# EAGLE board GEF-USB-B (EAGLE 6.4)
APPROVED: R.STARR; CHECKED: R.STARR; COMPANY: KG4LNE; COPYRIGHT: , KG4LNE; DATECODE: F1813; DRAWN: R.STARR; DRGNO: GEF-USB.2XX; REV: B; TITLE: GE-FLASH-USB
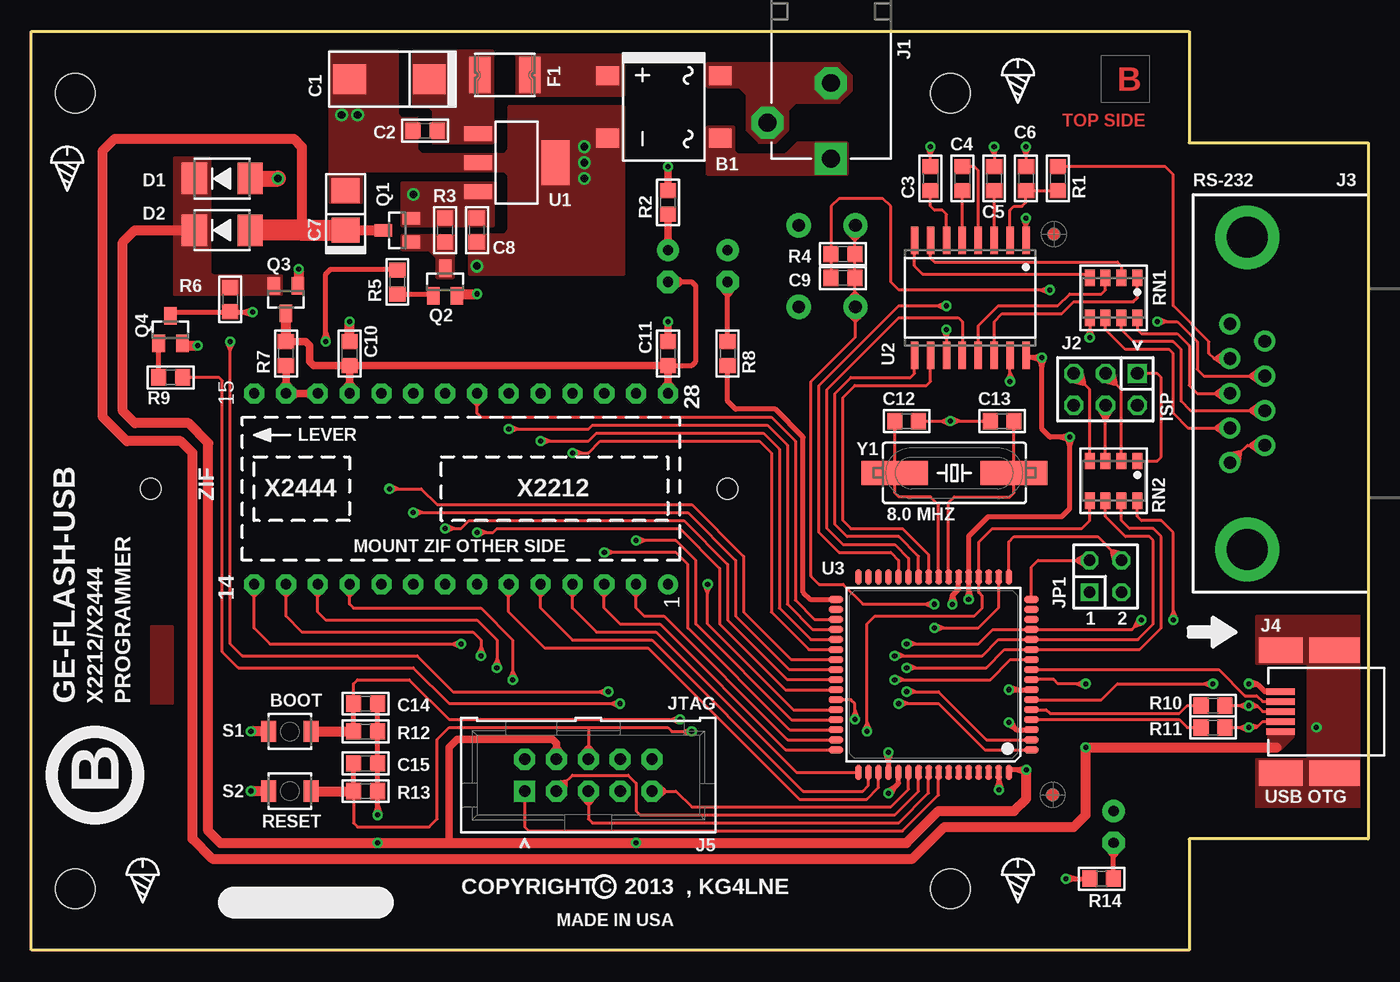
[diagram p0: board, top side]
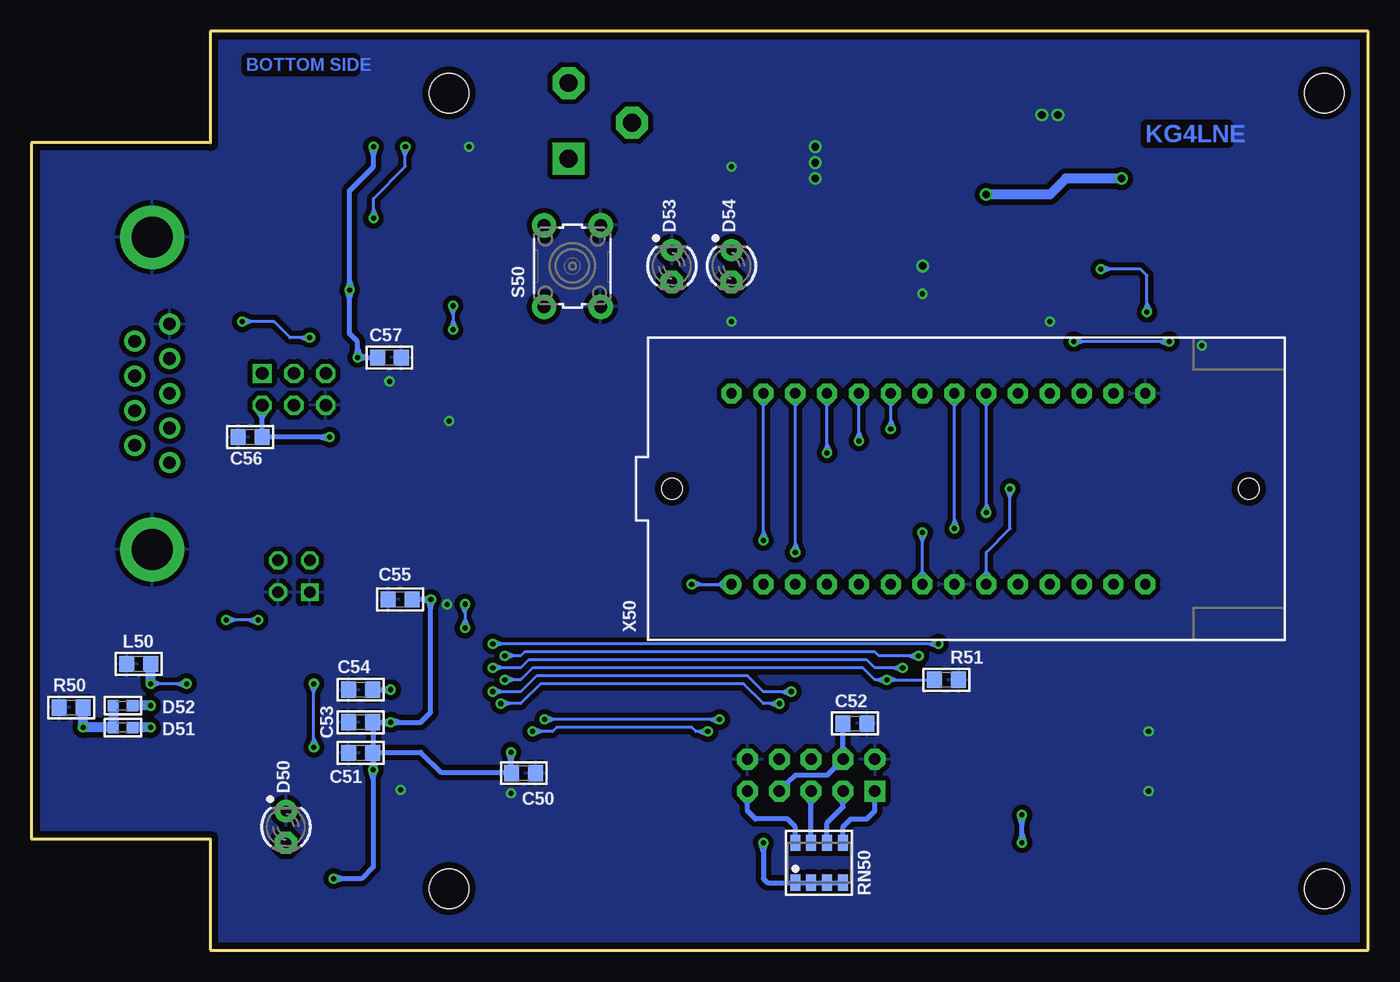
[diagram p1: board, bottom side, seen from below]

Size 106.68 x 73.34 mm. Coordinates in mm from the lower left corner, seen from the top.
Outline: 92.39,73.34 92.39,64.45 106.68,64.45 106.68,8.89 92.39,8.89 92.39,0 0,0 0,73.34 92.39,73.34
Copper layers (1*16): Top 0.035mm / dielectric 1.5mm / Bottom 0.035mm
Design rules "default *": minimum track width 7mil, minimum drill 16mil, track to track 8mil, track to pad 8mil, pad to pad 8mil, via to via 8mil, smd to smd 8mil, copper to edge 20mil, drill to drill 8mil, minimum pad ring 10mil, minimum via ring 8mil, stop-mask expansion 4mil, vias tented up to drill 24mil, thermal gap 16mil
Net classes: 0 default: width 0.178 mm, clearance 0.178 mm
Holes 3.17 mm at 73.34,4.92 3.49,68.42 3.49,4.92 73.34,68.42
Milling: 8 lines

## Footprints (pad centres in the part's own frame; a part is rotated, then mirrored left to right if it is on the bottom)
DF-S = smd 1.5 x 1.8: + -2.5,-4.5; - 2.5,-4.5; AC1 2.5,4.5; AC2 -2.5,4.5
C7343/T = smd 2.6 x 2.4: + 3.175,0; - -3.175,0
C0805 = smd 1.2 x 1.3: 1 -0.953,0; 2 0.953,0
C3528/T = smd 2 x 2.2: + 1.587,0; - -1.587,0
SMA = smd 2 x 2.5: A 2.223,0; C -2.223,0
LED3MM = drill 0.813 pad 1.778 octagon: A -1.27,0 | drill 0.813 pad 1.778: K 1.27,0
PGB-0603 = smd 0.9 x 0.9: 1 -0.762,0; 2 0.762,0
F1812 = smd 1.7 x 2.9: 1 -2,0; 2 2,0
PJ-102XH = drill 1.422 pad 2.54 square: 1 0,0 | drill 1.422 pad 2.54 octagon: 2 0,-6.032; 3 5.08,-2.857
HDR-MA03-2 = drill 1.016 square: 1 -2.54,-1.27 | drill 1.016 octagon: 2 -2.54,1.27; 3 0,-1.27; 4 0,1.27; 5 2.54,-1.27; 6 2.54,1.27
NC182M9 = drill 1.016 pad 1.676: 1 -5.537,2.769; 2 -2.769,2.769; 3 0,2.769; 4 2.769,2.769; 5 5.537,2.769; 6 -4.153,0; 7 -1.384,0; 8 1.384,0; 9 4.153,0 | drill 3.251 pad 5.08: G1 12.459,1.384; G2 -12.459,1.384
56579-0576 = smd 0.5 x 2.25: 1 1.6,0; 2 0.8,0; 3 0,0; 4 -0.8,0; 5 -1.6,0 | smd 2.05 x 3.5: S1 -4.9,0; S2 4.9,0 | smd 2.05 x 4: S3 -4.9,4.3; S4 4.9,4.3
HDR-5103309-1 = drill 0.914 pad 1.676 square: 1 -5.08,-1.27 | drill 0.914 pad 1.676 octagon: 2 -5.08,1.27; 3 -2.54,-1.27; 4 -2.54,1.27; 5 0,-1.27; 6 0,1.27; 7 2.54,-1.27; 8 2.54,1.27; 9 5.08,-1.27; 10 5.08,1.27
JP2Q = drill 0.914 square: 1 -1.27,-1.27 | drill 0.914 octagon: 2 -1.27,1.27; 3 1.27,-1.27; 4 1.27,1.27
L0805 = smd 1.2 x 1.3: 1 -0.953,0; 2 0.953,0
SOT23 = smd 1 x 1.4: 1 -0.95,-1.1; 2 0.95,-1.1; 3 0,1.1
R0805 = smd 1.2 x 1.3: 1 -0.953,0; 2 0.953,0
744-8 = smd 0.8 x 1.3: 1 -1.905,-1.587; 2 -0.635,-1.587; 3 0.635,-1.587; 4 1.905,-1.587; 5 1.905,1.587; 6 0.635,1.587; 7 -0.635,1.587; 8 -1.905,1.587
B3U-1000P = smd 1.2 x 1.7: 1 -1.7,0; 2 1.7,0
B3F-10XX-B = drill 1.016 pad 1.93: 1 -3.251,2.261; 2 3.251,2.261; 3 -3.251,-2.261; 4 3.251,-2.261
SOT223 = smd 1.219 x 2.235: 1 -2.311,-3.099; 2 0,-3.099; 3 2.311,-3.099 | smd 3.6 x 2.2: 4 0,3.099
SO16W = smd 0.6 x 2.2: 1 -4.445,-4.6; 2 -3.175,-4.6; 3 -1.905,-4.6; 4 -0.635,-4.6; 5 0.635,-4.6; 6 1.905,-4.6; 7 3.175,-4.6; 8 4.445,-4.6; 9 4.445,4.6; 10 3.175,4.6; 11 1.905,4.6; 12 0.635,4.6; 13 -0.635,4.6; 14 -1.905,4.6; 15 -3.175,4.6; 16 -4.445,4.6
TQFP64A = smd 1.194 x 0.559: 1 -7.8,6; 2 -7.8,5.2; 3 -7.8,4.4; 4 -7.8,3.6; 5 -7.8,2.8; 6 -7.8,2; 7 -7.8,1.2; 8 -7.8,0.4; 9 -7.8,-0.4; 10 -7.8,-1.2; 11 -7.8,-2; 12 -7.8,-2.8; 13 -7.8,-3.6; 14 -7.8,-4.4; 15 -7.8,-5.2; 16 -7.8,-6; 33 7.8,-6; 34 7.8,-5.2; 35 7.8,-4.4; 36 7.8,-3.6; 37 7.8,-2.8; 38 7.8,-2; 39 7.8,-1.2; 40 7.8,-0.4; 41 7.8,0.4; 42 7.8,1.2; 43 7.8,2; 44 7.8,2.8; 45 7.8,3.6; 46 7.8,4.4; 47 7.8,5.2; 48 7.8,6 | smd 0.559 x 1.194: 17 -6,-7.8; 18 -5.2,-7.8; 19 -4.4,-7.8; 20 -3.6,-7.8; 21 -2.8,-7.8; 22 -2,-7.8; 23 -1.2,-7.8; 24 -0.4,-7.8; 25 0.4,-7.8; 26 1.2,-7.8; 27 2,-7.8; 28 2.8,-7.8; 29 3.6,-7.8; 30 4.4,-7.8; 31 5.2,-7.8; 32 6,-7.8; 49 6,7.8; 50 5.2,7.8; 51 4.4,7.8; 52 3.6,7.8; 53 2.8,7.8; 54 2,7.8; 55 1.2,7.8; 56 0.4,7.8; 57 -0.4,7.8; 58 -1.2,7.8; 59 -2,7.8; 60 -2.8,7.8; 61 -3.6,7.8; 62 -4.4,7.8; 63 -5.2,7.8; 64 -6,7.8
ZIF28 = drill 0.813 pad 1.6: 1 -16.51,-7.62 | drill 0.813 pad 1.6 octagon: 2 -13.97,-7.62; 3 -11.43,-7.62; 4 -8.89,-7.62; 5 -6.35,-7.62; 6 -3.81,-7.62; 7 -1.27,-7.62; 8 1.27,-7.62; 9 3.81,-7.62; 10 6.35,-7.62; 11 8.89,-7.62; 12 11.43,-7.62; 13 13.97,-7.62; 14 16.51,-7.62; 15 16.51,7.62; 16 13.97,7.62; 17 11.43,7.62; 18 8.89,7.62; 19 6.35,7.62; 20 3.81,7.62; 21 1.27,7.62; 22 -1.27,7.62; 23 -3.81,7.62; 24 -6.35,7.62; 25 -8.89,7.62; 26 -11.43,7.62; 27 -13.97,7.62; 28 -16.51,7.62 | hole 1.676: -21.273,0; 24.765,0
HC49UP = smd 5.334 x 1.93: 1 -4.763,0; 2 4.763,0

## Placement (x,y rotation side)
B1  DF005S  [DF-S]  50.48,67.31 270 top
C1  4.7uF  [C7343/T]  28.57,69.53 0 top
C2  0.1uF  [C0805]  31.43,65.41 0 top
C3  1uF  [C0805]  71.75,61.59 270 top
C4  1uF  [C0805]  74.3,61.59 270 top
C5  1uF  [C0805]  76.83,61.59 270 top
C6  1uF  [C0805]  79.38,61.59 270 top
C7  4.7uF  [C3528/T]  25.08,59.05 270 top
C8  1uF  [C0805]  35.56,57.47 270 top
C9  0.22uF  [C0805]  64.77,53.66 180 top
C10  0.1uF  [C0805]  25.4,47.62 270 top
C11  0.1uF  [C0805]  50.8,47.62 270 top
C12  22pF  [C0805]  69.85,42.23 180 top
C13  22pF  [C0805]  77.47,42.23 0 top
C14  0.22uF  [C0805]  26.67,19.68 0 top
C15  0.22uF  [C0805]  26.67,14.92 0 top
C50  0.1uF  [C0805]  67.39,14.14 0 bottom
C51  0.1uF  [C0805]  80.4,15.75 0 bottom
C52  0.1uF  [C0805]  40.96,18.1 0 bottom
C53  1uF  [C0805]  80.4,18.2 0 bottom
C54  1uF  [C0805]  80.4,20.8 0 bottom
C55  0.1uF  [C0805]  77.25,28 180 bottom
C56  0.1uF  [C0805]  89.22,40.96 0 bottom
C57  0.1uF  [C0805]  78.11,47.31 0 bottom
D1  B140-13-F  [SMA]  15.24,61.59 0 top
D2  B140-13-F  [SMA]  15.24,57.47 0 top
D50  GREEN  [LED3MM]  86.36,9.84 90 bottom
D51  PGB1010603MR  [PGB-0603]  99.38,17.78 0 bottom
D52  PGB1010603MR  [PGB-0603]  99.38,19.53 0 bottom
D53  GREEN  [LED3MM]  55.56,54.61 90 bottom
D54  RED  [LED3MM]  50.8,54.61 90 bottom
F1  MINISMDC014F-2  [F1812]  37.78,69.85 180 top
FEAT1  [ICON_SCREW-S]  78.74,69.85 0 top
FEAT2  [PCBFEAT-MREV-076]  87.31,69.53 0 top
FEAT3  [ICON_SCREW-S]  2.86,62.87 0 top
FEAT4  [G10]  81.6,57.15 0 top
FEAT5  [ICON_PIN1_A]  88.27,47.94 90 top
FEAT6  [ICON_ARROW-S]  94.3,25.4 270 top
FEAT7  [PCBFEAT-DATECODE-050R]  11.05,19.94 90 top
FEAT8  [PCBFEAT-REV-150]  5.08,13.97 90 top
FEAT9  [G10]  81.5,12.4 0 top
FEAT10  [ICON_PIN1_A]  39.37,8.89 270 top
FEAT11  [ICON_SCREW-S]  8.89,6.03 0 top
FEAT12  [ICON_SCREW-S]  78.74,6.03 0 top
FEAT13  [PCBFEAT-COPYRIGHT-050]  34.29,4.45 0 top
FEAT14  [FIELD_SCRIBBLE-1]  21.91,3.81 0 top
J1  PJ-102AH/BH  [PJ-102XH]  63.82,63.18 180 top
J2  961206-6404-AR  [HDR-MA03-2]  85.72,44.77 180 top
J3  182-009-113R531  [NC182M9]  98.42,44.45 90 top
J4  56579-0576  [56579-0576]  99.69,19.05 270 top
J5  5103309-1  [HDR-5103309-1]  44.45,13.97 0 top
JP1  961204-6404-AR  [JP2Q]  85.72,29.84 0 top
L50  BEAD  [L0805]  98.11,22.86 0 bottom
Q1  DMP3130L  [SOT23]  29.21,57.47 90 top
Q2  BC847BMTF  [SOT23]  33.02,53.34 0 top
Q3  DMP3130L  [SOT23]  20.32,51.94 180 top
Q4  BC847BMTF  [SOT23]  11.11,49.53 0 top
R1  3.40K  [R0805]  81.92,61.59 90 top
R2  1K  [R0805]  50.8,59.69 270 top
R3  10K  [R0805]  33.02,57.47 90 top
R4  47K  [R0805]  64.77,55.56 180 top
R5  100K  [R0805]  29.21,53.34 270 top
R6  10K  [R0805]  15.88,51.94 270 top
R7  1K  [R0805]  20.32,47.62 90 top
R8  1K  [R0805]  55.56,47.62 270 top
R9  100K  [R0805]  11.11,45.72 0 top
R10  22R  [R0805]  94.3,19.53 180 top
R11  22R  [R0805]  94.3,17.78 180 top
R12  47K  [R0805]  26.67,17.46 0 top
R13  47K  [R0805]  26.67,12.7 0 top
R14  1K  [R0805]  85.41,5.71 180 top
R50  0R  [R0805]  103.5,19.37 180 bottom
R51  10K  [R0805]  33.66,21.59 180 bottom
RN1  47R  [744-8]  86.36,52.07 180 top
RN2  47R  [744-8]  86.36,37.47 180 top
RN50  100K  [744-8]  43.81,6.99 0 bottom
S1  B3U-1000P  [B3U-1000P]  20.64,17.46 0 top
S2  B3U-1000P  [B3U-1000P]  20.64,12.7 0 top
S50  B3F-1025  [B3F-10XX-B]  63.5,54.61 90 bottom
U1  LM340MP-5.0/NOPB  [SOT223]  38.73,62.87 270 top
U2  MAX232ECWE  [SO16W]  74.93,52.07 180 top
U3  AT90USB1286-AU  [TQFP64A]  72,22 180 top
X50  ZIF28  [ZIF28]  34.29,36.83 0 bottom
Y1  8.0 MHZ  [HC49UP]  73.66,38.1 0 top

## Library data of the parts
B1 = rectifier; PARTNO: DF005S
C1 = rc-master; PARTNO: TAJD475M035RNJ; VOLT: 35V
C2 C10 C11 C50-C52 C55-C57 = rc-master; PARTNO: GCM21BR72A104KA37L
C3-C6 C8 C53 C54 = rc-master; PARTNO: GCM21BR71E105KA56L
C7 = rc-master; PARTNO: TAJB475K010RNJ; VOLT: 10V
C9 = rc-master; DNP: T; PARTNO: GCM21BR71H224KA37L
C12 C13 = rc-master; PARTNO: GRM2195C2A220JZ01D
C14 C15 = rc-master; PARTNO: GCM21BR71H224KA37L
D1 D2 = diode; PARTNO: B140-13-F
D50 = LED; LABEL: PWR; PARTNO: TLHG4405
D51 D52 = diode; PARTNO: PGB1010603MR
D53 = LED; LABEL: STAT; PARTNO: TLHG4405
D54 = LED; LABEL: PGM; PARTNO: TLHR4405
F1 = fuse; PARTNO: MINISMDC014F-2
FEAT1 FEAT3 FEAT5 FEAT6 FEAT10-FEAT12 FEAT14 = dicons
FEAT2 FEAT7 FEAT8 FEAT13 = dpcb-feature
FEAT4 FEAT9 = dfiducial
J1 = con-cuistack; PARTNO: PJ-102AH
J2 = atmel-avr; PARTNO: 961206-6404-AR
J3 = con-subd; PARTNO: 182-009-113R531
J4 = con-usb; PARTNO: 56579-0576
J5 = atmel-avr; PARTNO: 5103309-1
JP1 = jumper; PARTNO: 961204-6404-AR
L50 = rc-master; PARTNO: BLM21PG221SN1D
Q1 Q3 = transistor-fet; PARTNO: DMP3130L
Q2 Q4 = transistor-npn; PARTNO: BC847BMTF
R1 = rc-master; PARTNO: ERJ-6ENF3401V
R2 R7 R8 R14 = rc-master; PARTNO: ERJ-6ENF1001V
R3 R6 R51 = rc-master; PARTNO: ERJ-6ENF1022V
R4 = rc-master; DNP: T; PARTNO: ERJ-6ENF4702V
R5 R9 = rc-master; PARTNO: ERJ-6ENF1003V
R10 R11 = rc-master; PARTNO: ERJ-6ENF22R1V
R12 R13 = rc-master; PARTNO: ERJ-6ENF4702V
R50 = rc-master; PARTNO: ERJ-6GEY0R00V
RN1 RN2 = resistor-array; PARTNO: 744C083470JTR
RN50 = resistor-array; PARTNO: 744C083104JPTR
S1 = switch-omron; LABEL: BOOT; PARTNO: B3U-1000P
S2 = switch-omron; LABEL: RESET; PARTNO: B3U-1000P
S50 = switch-omron; DNP: T; LABEL: PGM; PARTNO: B3F-1025
U1 = v-reg; PARTNO: LM340MP-5.0/NOPB
U2 = maxim; PARTNO: MAX232ECWE+
U3 = atmel-avr; PARTNO: AT90USB1286-AU
X50 = CUSTOM; PARTNO: 28-6554-11
Y1 = crystal; PARTNO: ECS-80-18-5PX-TR

## Nets
+5V: C6.1 C9.2 C14.2 C15.2 C50.1 C51.2 C52.1 C53.2 C55.1 C56.2 C57.1 D1.C D2.C J2.2 J5.4 J5.7 Q3.2 R4.2 R6.1 R12.2 R13.2 R14.2 RN50.1 RN50.2 RN50.3 RN50.4 U2.16 U3.3 U3.21 U3.52 U3.64
A0: U3.51 X50.6
A1: U3.50 X50.5
A2: U3.49 X50.4
A3: U3.48 X50.3
A4: U3.47 X50.2
A5: U3.46 X50.26
A6: U3.45 X50.27
A7: U3.44 X50.1
CFG1: JP1.2 U3.16
CFG2: JP1.4 U3.17
CS#: U3.42 X50.7
CTS: U2.9 U3.26
DB0: U3.35 X50.22
DB1: U3.36 X50.23
DB2: U3.37 X50.24
DB3: U3.38 X50.25
EPWR: R9.2 U3.1
GND: B1.- C1.- C2.1 C3.1 C7.- C8.2 C10.1 C11.1 C12.1 C13.1 C50.2 C51.1 C52.2 C53.1 C54.1 C55.2 C56.1 C57.2 D50.K D53.K J2.6 J3.5 J3.G1 J3.G2 J5.2 J5.10 JP1.1 JP1.3 L50.1 Q2.2 Q4.2 R2.1 R50.2 R51.1 S1.1 S2.1 S50.3 S50.4 U1.2 U1.4 U2.15 U3.22 U3.53 U3.63 X50.8 X50.15
HWBOOT: C14.1 R12.1 S1.2 U3.43
LED: R8.2 U3.33
MISO: RN2.8 U3.13 X50.14
MOSI: RN2.6 U3.12 X50.13
N$1: J2.5 RN2.4
N$2: B1.AC2 J1.2 J1.3
N$3: R10.2 U3.5
N$4: D52.2 J4.3 R10.1
N$5: R11.2 U3.4
N$6: D51.2 J4.2 R11.1
N$7: C54.2 U3.7
N$8: D50.A R14.1
N$9: D51.1 D52.1 J4.S1 J4.S2 J4.S3 J4.S4 R50.1
N$10: D53.A R8.1
N$11: Q1.1 Q2.3 R3.1
N$12: Q2.1 R5.2
N$14: Q3.1 Q4.3 R6.2
N$15: C10.2 C11.2 D54.A Q3.3 R7.2 X50.18 X50.28
N$17: D54.K R2.2
N$18: J4.5 L50.2 U3.6
N$19: J3.1 J3.6
N$20: C1.+ C2.2 F1.2 U1.1
N$21: C8.1 D1.A Q1.2 R3.2 U1.3
N$22: J3.2 RN1.6
N$23: B1.+ F1.1
N$24: B1.AC1 J1.1
N$25: Q4.1 R9.1
N$30: C12.2 U3.24 Y1.1
N$31: J3.7 RN1.7
N$34: C3.2 U2.6
N$36: C6.2 R1.1 U2.2
N$38: C13.2 U3.23 Y1.2
N$39: C4.1 U2.4
N$44: C5.1 U2.1
N$45: C4.2 U2.5
N$46: C5.2 U2.3
N$51: J3.8 RN1.5
N$71: J3.3 RN1.8
N$74: RN1.3 U2.13
N$75: RN1.1 U2.14
N$101: RN1.4 U2.8
N$103: J3.4 R1.2
N$104: RN1.2 U2.7
N$105: J2.1 RN2.1
N$107: J2.3 RN2.2
N$108: J2.4 RN2.3
PBSW: C9.1 R4.1 S50.1 S50.2 U3.18
PU2: R7.1 X50.16 X50.17
RECALL#: U3.40 X50.20
RESET#: C15.1 J5.6 R13.1 RN2.5 S2.2 U3.20
RTS: U2.10 U3.25
RXD: U2.12 U3.27
SCLK: RN2.7 U3.11 X50.12
SS: R51.2 U3.10 X50.11
STORE#: U3.39 X50.9
TCK: J5.1 RN50.5 U3.57
TDI: J5.9 RN50.8 U3.54
TDO: J5.3 RN50.6 U3.55
TMS: J5.5 RN50.7 U3.56
TXD: U2.11 U3.28
UID: J4.4 U3.9
UVCON: R5.1 U3.2
VBUS: C7.+ D2.A J4.1 Q1.3 U3.8
WE#: U3.41 X50.21

## Tracks (layer width: path | path; a pad name or v marks a point on that pad's centre or on a via)
+5V  (via drill 0.41)
  Top 0.254: U3.64 78,13.97 | v79.38,64.14 79.38,63.42 | 79.38,63.42 C6.1 | v81.28,52.7 80.57,52.7 | 80.57,52.7 69.22,52.7 68.58,53.34 68.58,59.37 67.94,60.01 64.45,60.01 63.82,59.37 R4.2 C9.2 | 79.38,63.42 79.63,64.03 v79.38,64.14 | 79.38,63.42 79.12,64.03 v79.38,64.14 | 80.57,52.7 81.17,52.45 v81.28,52.7 | 80.57,52.7 81.17,52.96 v81.28,52.7
  Top 0.406: v78,18.2 78.5,17.7 | 78.5,17.7 78.6,17.6 U3.3 | v74.8,28 74.8,28.71 | 74.8,28.71 U3.21 74.8,33.05 76.36,34.61 82.23,34.61 82.87,35.24 82.87,40.25 | v68.4,15.8 68.4,15.09 | 68.4,15.09 U3.52 | v79.4,14.4 78.69,14.4 | 78.69,14.4 78,14.4 U3.64 | 82.87,40.25 v82.87,40.96 | U2.16 79.38,47.31 79.93,47.31 | v80.64,47.31 79.93,47.31 | 80.64,46.6 80.64,41.59 81.28,40.96 82.16,40.96 | 80.64,46.6 v80.64,47.31 | v82.87,40.96 82.16,40.96 | C14.2 R12.2 C15.2 R13.2 27.62,11.51 | v27.62,10.79 27.62,11.51 | v82.55,5.71 83.26,5.71 | 83.26,5.71 R14.2 | 78.5,17.7 78.18,18.3 v78,18.2 | 78.5,17.7 77.9,18.02 v78,18.2 | 74.8,28.71 74.61,28.06 v74.8,28 | 74.8,28.71 75,28.06 v74.8,28 | 78.69,14.4 79.34,14.21 v79.4,14.4 | 78.69,14.4 79.34,14.6 v79.4,14.4 | 68.4,15.09 68.59,15.74 v68.4,15.8 | 68.4,15.09 68.2,15.74 v68.4,15.8 | 82.87,40.25 83.06,40.9 v82.87,40.96 | 82.87,40.25 82.67,40.9 v82.87,40.96 | 82.16,40.96 82.81,40.76 v82.87,40.96 | 82.16,40.96 82.81,41.15 v82.87,40.96 | 79.93,47.31 80.59,47.11 v80.64,47.31 | 79.93,47.31 80.59,47.5 v80.64,47.31 | 80.64,46.6 80.84,47.25 v80.64,47.31 | 80.64,46.6 80.45,47.25 v80.64,47.31 | 27.62,11.51 27.43,10.85 v27.62,10.79 | 27.62,11.51 27.82,10.85 v27.62,10.79 | 83.26,5.71 82.61,5.91 v82.55,5.71 | 83.26,5.71 82.61,5.52 v82.55,5.71
  Top 0.61: 41.91,16.15 41.91,16.51 41.59,16.83 33.97,16.83 33.34,16.19 33.34,8.57 | 41.91,16.15 J5.4 | 41.91,16.15 41.48,15.55 J5.4 | 41.91,16.15 42.34,15.55 J5.4
  Top 0.813: v79.4,14.4 79.4,12.09 78.42,11.11 72.39,11.11 69.85,8.57 v48.26,8.57 33.34,8.57 v27.62,8.57 15.08,8.57 14.13,9.53 14.13,40.48 12.54,42.07 8.26,42.07 7.3,43.02 7.3,56.52 8.26,57.47 D2.C
  Bottom 0.406: v78,18.2 77.29,18.2 | 77.29,18.2 75.6,18.2 74.8,19 74.8,27.29 | 74.8,27.29 v74.8,28 | v74.8,28 75.51,28 | 75.51,28 C55.1 | C51.2 79.4,15.75 79.4,15.11 | v79.4,14.4 79.4,15.11 | 78.71,18.2 C53.2 79.38,18.2 79.38,15.75 C51.2 | 78.71,18.2 v78,18.2 | J5.4 41.91,16.15 | 41.91,16.15 C52.1 | v80.64,47.31 79.93,47.31 | 79.93,47.31 C57.1 | 88.27,42.48 C56.2 83.58,40.96 | 88.27,42.48 J2.2 | v82.87,40.96 83.58,40.96 | 79.38,63.42 C6.1 81.28,60.64 81.28,53.42 | 79.38,63.42 v79.38,64.14 | v81.28,52.7 81.28,53.42 | v80.64,47.31 80.64,48.02 | 80.64,48.02 80.64,48.58 81.28,49.21 81.28,51.99 | 81.28,51.99 v81.28,52.7 | C51.2 79.45,15.8 75.6,15.8 74,14.2 U3.52 | C50.1 68.4,14.14 U3.52 | U3.52 68.4,15.09 | 68.4,15.09 v68.4,15.8 | 46.34,13.35 45.72,13.97 43.18,13.97 42.56,14.59 | 46.34,13.35 J5.7 | J5.4 42.56,14.59 | RN50.4 RN50.3 RN50.2 RN50.1 47.94,5.4 48.26,5.71 48.26,7.86 | v48.26,8.57 48.26,7.86 | v27.62,8.57 27.62,9.28 | 27.62,9.28 27.62,10.08 | 27.62,10.08 v27.62,10.79 | v79.4,14.4 79.4,13.69 | 79.4,13.69 79.4,6.64 80.33,5.71 81.84,5.71 | 81.84,5.71 v82.55,5.71 | 77.29,18.2 77.94,18 v78,18.2 | 77.29,18.2 77.94,18.39 v78,18.2 | 78.71,18.2 78.06,18.39 v78,18.2 | 78.71,18.2 78.06,18 v78,18.2 | 74.8,27.29 75,27.94 v74.8,28 | 74.8,27.29 74.61,27.94 v74.8,28 | 75.51,28 74.86,28.2 v74.8,28 | 75.51,28 74.86,27.8 v74.8,28 | 79.4,15.11 79.2,14.46 v79.4,14.4 | 79.4,15.11 79.59,14.46 v79.4,14.4 | 79.4,13.69 79.59,14.34 v79.4,14.4 | 79.4,13.69 79.2,14.34 v79.4,14.4 | 68.4,15.09 68.59,15.74 v68.4,15.8 | 68.4,15.09 68.2,15.74 v68.4,15.8 | 83.58,40.96 82.93,41.15 v82.87,40.96 | 83.58,40.96 82.93,40.76 v82.87,40.96 | 79.93,47.31 80.59,47.11 v80.64,47.31 | 79.93,47.31 80.59,47.5 v80.64,47.31
  Bottom 0.406: 80.64,48.02 80.45,47.37 v80.64,47.31 | 80.64,48.02 80.84,47.37 v80.64,47.31 | 79.38,63.42 79.57,64.08 v79.38,64.14 | 79.38,63.42 79.18,64.08 v79.38,64.14 | 48.26,7.86 48.45,8.51 v48.26,8.57 | 48.26,7.86 48.06,8.51 v48.26,8.57 | 27.62,10.08 27.82,10.74 v27.62,10.79 | 27.62,10.08 27.43,10.74 v27.62,10.79 | 27.62,9.28 27.43,8.63 v27.62,8.57 | 27.62,9.28 27.82,8.63 v27.62,8.57 | 81.84,5.71 82.49,5.52 v82.55,5.71 | 81.84,5.71 82.49,5.91 v82.55,5.71 | 81.28,53.42 81.08,52.76 v81.28,52.7 | 81.28,53.42 81.47,52.76 v81.28,52.7 | 81.28,51.99 81.47,52.65 v81.28,52.7 | 81.28,51.99 81.08,52.65 v81.28,52.7 | 41.91,16.15 41.45,15.68 J5.4 | 41.91,16.15 42.37,15.68 J5.4 | 42.56,14.59 42.55,15.25 J5.4 | 42.56,14.59 41.9,14.61 J5.4 | 46.34,13.35 46.35,12.69 J5.7 | 46.34,13.35 47,13.34 J5.7 | 88.27,42.48 88.73,43.19 J2.2 | 88.27,42.48 87.8,43.19 J2.2
  pour Top (isolate 0.406, no thermals): 11.43,63.25 14.22,63.25 14.22,54.1 14.48,53.85 19.94,53.85 19.94,52.32 11.43,52.32
A0
  Top 0.254: U3.51 67.6,12.99 66.67,12.06 61.28,12.06 49.21,24.13 40.96,24.13 38.1,26.99 38.1,28.4 X50.6
  Top 0.508: 38.1,28.4 38.5,28.84 X50.6 37.7,28.84 38.1,28.4
A1
  Top 0.254: U3.50 66.8,13.14 66.36,12.7 61.59,12.7 49.53,24.77 43.18,24.77 40.64,27.3 40.64,28.4 X50.5
  Top 0.508: 40.64,28.4 41.04,28.84 X50.5 40.24,28.84 40.64,28.4
A2
  Top 0.254: U3.49 61.05,14.2 49.85,25.4 45.09,25.4 43.18,27.3 43.18,28.4 X50.4
  Top 0.508: 43.18,28.4 43.58,28.84 X50.4 42.78,28.84 43.18,28.4
A3
  Top 0.254: U3.48 60.2,16 50.16,26.04 46.99,26.04 45.72,27.3 45.72,28.4 X50.3
  Top 0.508: 45.72,28.4 46.12,28.84 X50.3 45.32,28.84 45.72,28.4
A4
  Top 0.254: U3.47 60.35,16.8 50.48,26.67 48.9,26.67 48.26,27.3 48.26,28.4 X50.2
  Top 0.508: 48.26,28.4 48.66,28.84 X50.2 47.86,28.84 48.26,28.4
A5  (via drill 0.41)
  Top 0.254: U3.46 60.51,17.6 52.39,25.72 52.39,30.8 51.44,31.75 46.43,31.75 | 46.43,31.75 v45.72,31.75 | 46.43,31.75 45.83,32.01 v45.72,31.75 | 46.43,31.75 45.83,31.49 v45.72,31.75
  Bottom 0.254: v45.72,31.75 45.72,32.46 | 45.72,32.46 45.72,43.64 X50.26 | 45.72,32.46 45.46,31.86 v45.72,31.75 | 45.72,32.46 45.98,31.86 v45.72,31.75
  Bottom 0.508: 45.72,43.64 46.12,44.08 X50.26 45.32,44.08 45.72,43.64
A6  (via drill 0.41)
  Top 0.254: U3.45 60.66,18.4 53.02,26.04 53.02,31.11 51.44,32.7 48.97,32.7 | 48.97,32.7 v48.26,32.7 | 48.97,32.7 48.37,32.96 v48.26,32.7 | 48.97,32.7 48.37,32.45 v48.26,32.7
  Bottom 0.254: v48.26,32.7 48.26,33.41 | 48.26,33.41 48.26,43.64 X50.27 | 48.26,33.41 48,32.81 v48.26,32.7 | 48.26,33.41 48.52,32.81 v48.26,32.7
  Bottom 0.508: 48.26,43.64 48.66,44.08 X50.27 47.86,44.08 48.26,43.64
A7  (via drill 0.41)
  Top 0.254: U3.44 60.81,19.2 53.98,26.04 53.98,28.5 | 53.98,28.5 v53.98,29.21 | 53.98,28.5 54.23,29.1 v53.98,29.21 | 53.98,28.5 53.72,29.1 v53.98,29.21
  Bottom 0.254: v53.98,29.21 53.26,29.21 | 53.26,29.21 51.61,29.21 X50.1 | 53.26,29.21 53.87,28.95 v53.98,29.21 | 53.26,29.21 53.87,29.47 v53.98,29.21
  Bottom 0.508: 51.61,29.21 51.17,29.61 X50.1 51.17,28.81 51.61,29.21
CFG1
  Top 0.254: U3.16 79.8,30.59 80.33,31.11 83.54,31.11 JP1.2
  Top 0.508: 83.54,31.11 84.23,30.72 JP1.2 84.23,31.51 83.54,31.11
CFG2
  Top 0.254: JP1.4 86.35,31.76 85.09,33.02 78.42,33.02 78,32.6 U3.17
  Top 0.508: 86.35,31.76 86.55,31 JP1.4 87.11,31.56 86.35,31.76
CS#  (via drill 0.41)
  Top 0.254: U3.42 60.16,20.8 54.93,26.04 54.93,30.48 51.75,33.66 37.15,33.66 36.83,33.34 36.27,33.34 | v35.56,33.34 36.27,33.34 | 36.27,33.34 35.67,33.59 v35.56,33.34 | 36.27,33.34 35.67,33.08 v35.56,33.34
  Bottom 0.254: X50.7 35.56,30.02 35.56,32.63 | 35.56,32.63 v35.56,33.34 | 35.56,32.63 35.82,33.23 v35.56,33.34 | 35.56,32.63 35.3,33.23 v35.56,33.34
  Bottom 0.508: 35.56,30.02 35.16,29.58 X50.7 35.96,29.58 35.56,30.02
CTS
  Top 0.254: U3.26 70.8,31.43 69.22,33.02 65.09,33.02 64.14,33.97 64.14,44.45 65.41,45.72 70.17,45.72 70.48,46.04 U2.9
DB0
  Top 0.254: U3.35 62.5,26.4 60.96,27.94 60.96,40.64 59.05,42.55 35.88,42.55 35.56,42.86 35.56,43.64 X50.22
  Top 0.508: 35.56,43.64 35.96,44.08 X50.22 35.16,44.08 35.56,43.64
DB1  (via drill 0.41)
  Top 0.254: U3.36 62.35,25.6 60.33,27.62 60.33,40.32 58.74,41.91 44.77,41.91 44.45,41.59 38.81,41.59 | v38.1,41.59 38.81,41.59 | 38.81,41.59 38.21,41.85 v38.1,41.59 | 38.81,41.59 38.21,41.34 v38.1,41.59
  Bottom 0.254: v38.1,41.59 38.1,42.3 | 38.1,42.3 38.1,43.64 X50.23 | 38.1,42.3 37.84,41.7 v38.1,41.59 | 38.1,42.3 38.36,41.7 v38.1,41.59
  Bottom 0.508: 38.1,43.64 38.5,44.08 X50.23 37.7,44.08 38.1,43.64
DB2  (via drill 0.41)
  Top 0.254: U3.37 62.2,24.8 59.69,27.3 59.69,40.01 58.42,41.27 45.09,41.27 44.45,40.64 41.35,40.64 | v40.64,40.64 41.35,40.64 | 41.35,40.64 40.75,40.9 v40.64,40.64 | 41.35,40.64 40.75,40.38 v40.64,40.64
  Bottom 0.254: v40.64,40.64 40.64,41.35 | 40.64,41.35 40.64,43.64 X50.24 | 40.64,41.35 40.38,40.75 v40.64,40.64 | 40.64,41.35 40.9,40.75 v40.64,40.64
  Bottom 0.508: 40.64,43.64 41.04,44.08 X50.24 40.24,44.08 40.64,43.64
DB3  (via drill 0.41)
  Top 0.254: U3.38 62.04,24 59.05,26.99 59.05,39.69 58.1,40.64 45.4,40.64 44.45,39.69 43.89,39.69 | v43.18,39.69 43.89,39.69 | 43.89,39.69 43.29,39.94 v43.18,39.69 | 43.89,39.69 43.29,39.43 v43.18,39.69
  Bottom 0.254: v43.18,39.69 43.18,40.4 | 43.18,40.4 43.18,43.64 X50.25 | 43.18,40.4 42.92,39.8 v43.18,39.69 | 43.18,40.4 43.44,39.8 v43.18,39.69
  Bottom 0.508: 43.18,43.64 43.58,44.08 X50.25 42.78,44.08 43.18,43.64
EPWR  (via drill 0.41)
  Top 0.254: U3.1 76.08,16 72.39,19.68 69.93,19.68 | v69.22,19.68 69.93,19.68 | 46.28,19.68 33.34,19.68 30.48,22.54 16.51,22.54 15.24,23.81 15.24,45.47 14.99,45.72 R9.2 | 46.28,19.68 v46.99,19.68 | 69.93,19.68 69.33,19.94 v69.22,19.68 | 69.93,19.68 69.33,19.43 v69.22,19.68 | 46.28,19.68 46.88,19.43 v46.99,19.68 | 46.28,19.68 46.88,19.94 v46.99,19.68
  Bottom 0.254: 68.5,19.68 67.63,19.68 66.04,21.27 49.85,21.27 48.26,19.68 47.7,19.68 | 68.5,19.68 v69.22,19.68 | v46.99,19.68 47.7,19.68 | 68.5,19.68 69.11,19.43 v69.22,19.68 | 68.5,19.68 69.11,19.94 v69.22,19.68 | 47.7,19.68 47.1,19.94 v46.99,19.68 | 47.7,19.68 47.1,19.43 v46.99,19.68
GND  (via drill 0.41, 0.61)
  Top 0.254: v78.11,45.4 78.11,46.11 | 78.11,46.11 U2.15 | C3.1 71.75,63.42 | 71.75,63.42 v71.75,64.14 | v73.34,42.23 74.05,42.23 | 74.05,42.23 C13.1 | C12.1 72.63,42.23 | 72.63,42.23 v73.34,42.23 | 78.11,46.11 77.85,45.51 v78.11,45.4 | 78.11,46.11 78.36,45.51 v78.11,45.4 | 71.75,63.42 72.01,64.03 v71.75,64.14 | 71.75,63.42 71.5,64.03 v71.75,64.14 | 74.05,42.23 73.45,42.48 v73.34,42.23 | 74.05,42.23 73.45,41.97 v73.34,42.23 | 72.63,42.23 73.23,41.97 v73.34,42.23 | 72.63,42.23 73.23,42.48 v73.34,42.23
  Top 0.406: U3.22 74,28.8 73.51,28.31 | 73.51,28.31 73.5,28.3 v73.5,27.6 | v68.4,12.54 68.9,13.04 | 68.9,13.04 69.2,13.34 U3.53 | U3.63 77.2,13.51 | 77.2,13.51 v77.2,12.8 | 68.9,13.04 68.3,12.71 v68.4,12.54 | 68.9,13.04 68.58,12.44 v68.4,12.54 | 77.2,13.51 77,12.86 v77.2,12.8 | 77.2,13.51 77.39,12.86 v77.2,12.8 | 73.51,28.31 73.31,27.66 v73.5,27.6 | 73.51,28.31 73.7,27.66 v73.5,27.6
  Top 0.61: C11.1 v50.8,50.16 | R2.1 v50.8,62.55
  Top 0.813: C10.1 v25.4,50.16 | S2.1 v17.53,12.7 | S1.1 v17.53,17.46 | Q2.2 33.97,52.39 v35.56,52.39 | Q4.2 12.06,48.26 v13.27,48.26
  other vias: 35.56,54.61 24.77,66.67 26.04,66.67 44.13,62.87 44.13,61.59 44.13,64.14
  pour Bottom (isolate 0.406): 0.64,72.71 8.57,72.71 19.68,72.71 91.76,72.71 91.76,63.82 106.05,63.82 106.05,9.53 91.76,9.53 91.76,0.64 0.64,0.64
  pour Top (isolate 0.406, no thermals): 23.81,71.75 23.81,59.69 26.35,59.69 26.35,61.91 26.67,62.23 37.72,62.23 38.1,61.85 38.1,57.47 37.72,57.09 34.92,57.09 34.92,53.98 47.31,53.98 47.31,67.31 38.1,67.31 38.1,63.88 37.72,63.5 31.18,63.5 30.8,63.88 30.8,66.36 29.53,66.36 29.21,66.67 29.21,71.75
HWBOOT  (via drill 0.41)
  Top 0.254: U3.43 65.41,20 65.72,19.68 65.72,19.13 | v65.72,18.41 65.72,19.13 | 51.04,18.41 33.34,18.41 30.16,21.59 26.04,21.59 25.72,21.27 C14.1 | 51.04,18.41 v51.75,18.41 | 65.72,19.13 65.47,18.52 v65.72,18.41 | 65.72,19.13 65.98,18.52 v65.72,18.41 | 51.04,18.41 51.64,18.16 v51.75,18.41 | 51.04,18.41 51.64,18.67 v51.75,18.41
  Top 0.406: R12.1 C14.1
  Top 0.813: S1.2 R12.1
  Bottom 0.254: v51.75,18.41 52.46,18.41 | 52.46,18.41 65.01,18.41 | 65.01,18.41 v65.72,18.41 | 65.01,18.41 65.61,18.16 v65.72,18.41 | 65.01,18.41 65.61,18.67 v65.72,18.41 | 52.46,18.41 51.86,18.67 v51.75,18.41 | 52.46,18.41 51.86,18.16 v51.75,18.41
LED
  Top 0.406: U3.33 62.17,28 61.59,28.57 61.59,40.96 59.37,43.18 56.2,43.18 55.56,43.81 R8.2
MISO  (via drill 0.41)
  Top 0.254: 88.08,25.85 87.83,25.6 U3.13 76.72,25.6 75.56,24.45 70.56,24.45 | 88.08,25.85 v88.58,26.35 | v91.12,26.35 91.12,27.06 | 91.12,27.06 91.12,33.34 90.17,34.29 88.58,34.29 88.27,34.61 RN2.8 | v69.85,24.45 70.56,24.45 | X50.14 17.78,28.4 17.78,25.72 19.05,24.45 33.58,24.45 | 33.58,24.45 v34.29,24.45 | 88.08,25.85 88.69,26.09 v88.58,26.35 | 88.08,25.85 88.32,26.46 v88.58,26.35 | 91.12,27.06 90.87,26.46 v91.12,26.35 | 91.12,27.06 91.38,26.46 v91.12,26.35 | 70.56,24.45 69.96,24.7 v69.85,24.45 | 70.56,24.45 69.96,24.19 v69.85,24.45 | 33.58,24.45 34.18,24.19 v34.29,24.45 | 33.58,24.45 34.18,24.7 v34.29,24.45
  Top 0.508: 17.78,28.4 18.18,28.84 X50.14 17.38,28.84 17.78,28.4
  Bottom 0.254: v88.58,26.35 89.29,26.35 | 89.29,26.35 90.41,26.35 | 90.41,26.35 v91.12,26.35 | v34.29,24.45 35,24.45 | 35,24.45 69.14,24.45 | 69.14,24.45 v69.85,24.45 | 89.29,26.35 88.69,26.61 v88.58,26.35 | 89.29,26.35 88.69,26.1 v88.58,26.35 | 90.41,26.35 91.01,26.1 v91.12,26.35 | 90.41,26.35 91.01,26.61 v91.12,26.35 | 69.14,24.45 69.74,24.19 v69.85,24.45 | 69.14,24.45 69.74,24.7 v69.85,24.45 | 35,24.45 34.4,24.7 v34.29,24.45 | 35,24.45 34.4,24.19 v34.29,24.45
MOSI  (via drill 0.41)
  Top 0.254: RN2.6 85.72,34.61 87.31,33.02 89.22,33.02 89.53,32.7 89.53,26.04 88.3,24.8 U3.12 77.19,24.8 75.88,23.5 69.61,23.5 | v68.9,23.5 69.61,23.5 | X50.13 20.32,28.4 20.32,26.67 21.59,25.4 35.24,25.4 35.88,24.77 35.88,24.21 | 35.88,24.21 v35.88,23.5 | 69.61,23.5 69.01,23.75 v68.9,23.5 | 69.61,23.5 69.01,23.24 v68.9,23.5 | 35.88,24.21 35.62,23.61 v35.88,23.5 | 35.88,24.21 36.13,23.61 v35.88,23.5
  Top 0.508: 20.32,28.4 20.72,28.84 X50.13 19.92,28.84 20.32,28.4
  Bottom 0.254: 68.19,23.5 67.63,23.5 67.31,23.81 39.37,23.81 39.05,23.5 36.59,23.5 | 68.19,23.5 v68.9,23.5 | v35.88,23.5 36.59,23.5 | 68.19,23.5 68.79,23.24 v68.9,23.5 | 68.19,23.5 68.79,23.75 v68.9,23.5 | 36.59,23.5 35.99,23.75 v35.88,23.5 | 36.59,23.5 35.99,23.24 v35.88,23.5
N$1
  Top 0.254: J2.5 83.9,45.32 84.45,44.77 RN2.4
  Top 0.508: 83.9,45.32 83.68,46.17 J2.5 83.05,45.55 83.9,45.32
N$2
  pour Top (no thermals): 53.98,70.8 64.45,70.8 65.41,69.85 65.41,68.58 64.45,67.63 60.96,67.63 60.33,66.99 60.33,65.41 59.37,64.45 58.1,64.45 57.15,65.41 57.15,68.26 56.52,68.9 53.98,68.9
N$3
  Top 0.254: R10.2 92.23,19.53 91.6,18.89 81.28,18.89 80.97,19.2 U3.5
N$4  (via drill 0.41)
  Top 0.254: R10.1 96.44,19.53 | 96.44,19.53 v97.16,19.53 | J4.3 98.27,19.05 97.86,19.45 | 97.86,19.45 97.79,19.53 v97.16,19.53 | 96.44,19.53 97.05,19.27 v97.16,19.53 | 96.44,19.53 97.05,19.78 v97.16,19.53 | 97.86,19.45 97.29,19.77 v97.16,19.53 | 97.86,19.45 97.24,19.26 v97.16,19.53
  Bottom 0.813: 98.58,19.53 D52.2 v97.16,19.53
N$5
  Top 0.178: U3.4 79.8,18.41
  Top 0.254: R11.2 92.23,17.78 91.6,18.41 79.8,18.41
N$6  (via drill 0.41)
  Top 0.254: R11.1 96.44,17.78 | 96.44,17.78 v97.16,17.78 | J4.2 98.26,18.25 97.86,17.85 | 97.86,17.85 97.79,17.78 v97.16,17.78 | 96.44,17.78 97.05,17.52 v97.16,17.78 | 96.44,17.78 97.05,18.04 v97.16,17.78 | 97.86,17.85 97.24,18.05 v97.16,17.78 | 97.86,17.85 97.29,17.54 v97.16,17.78
  Bottom 0.813: v97.16,17.78 D51.2
N$7  (via drill 0.41)
  Top 0.406: v78,20.8 78.71,20.8 | 78.71,20.8 U3.7 | 78.71,20.8 78.06,21 v78,20.8 | 78.71,20.8 78.06,20.61 v78,20.8
  Bottom 0.406: v78,20.8 78.71,20.8 | 78.71,20.8 C54.2 | 78.71,20.8 78.06,21 v78,20.8 | 78.71,20.8 78.06,20.61 v78,20.8
N$8
  Top 0.406: R14.1 86.36,7.76 D50.A
  Top 0.813: 86.36,7.76 86.75,8.29 D50.A 85.97,8.29 86.36,7.76
N$9  (via drill 0.41)
  Bottom 0.813: R50.1 v102.55,17.78 D51.1 D52.1
  pour Top (isolate 0.406, no thermals): 97.79,26.67 106.05,26.67 106.05,11.43 97.79,11.43 97.79,15.24 101.92,15.24 101.92,22.86 97.79,22.86
N$10
  Top 0.406: R8.1 55.56,52.53 D53.A
  Top 0.813: 55.56,52.53 55.95,53.05 D53.A 55.17,53.05 55.56,52.53
N$11
  pour Top (isolate 0.406, no thermals): 29.59,57.09 33.66,57.09 33.66,53.66 32.38,53.66 32.38,55.24 31.75,55.88 29.59,55.88
N$12
  Top 0.406: Q2.1 32.07,52.39 R5.2
N$13
  pour Top: 9.53,19.68 11.3,19.68 11.3,25.84 9.53,25.84
N$14  (via drill 0.41)
  Top 0.406: 15.88,50.93 16.94,50.93 | 16.94,50.93 v17.65,50.93 | 15.88,50.93 R6.2 | Q4.3 11.11,50.93 15.88,50.93 | 16.94,50.93 17.59,50.73 v17.65,50.93 | 16.94,50.93 17.59,51.12 v17.65,50.93
  Top 0.813: Q3.1 21.34,53.04 v21.34,54.36
  Bottom 0.254: 20.62,54.36 18.16,54.36 17.65,53.85 17.65,51.64 | 20.62,54.36 v21.34,54.36 | v17.65,50.93 17.65,51.64 | 20.62,54.36 21.23,54.1 v21.34,54.36 | 20.62,54.36 21.23,54.61 v21.34,54.36 | 17.65,51.64 17.4,51.04 v17.65,50.93 | 17.65,51.64 17.91,51.04 v17.65,50.93
N$15
  Top 0.406: D54.A 51.61,53.34 52.7,53.34 53.02,53.02 53.02,46.99 52.7,46.67 C11.2
  Top 0.61: 50.8,45.26 C11.2 C10.2 | 50.8,45.26 X50.28 | C10.2 25.4,45.26 | 25.4,45.26 X50.18 | R7.2 21.91,48.58 22.23,48.26 22.23,46.99 22.54,46.67 C10.2 | 25.4,45.26 25.01,44.75 X50.18 | 25.4,45.26 25.79,44.75 X50.18 | 50.8,45.26 50.41,44.75 X50.28 | 50.8,45.26 51.19,44.75 X50.28
  Top 0.813: R7.2 Q3.3 | 51.61,53.34 51.09,53.73 D54.A 51.09,52.95 51.61,53.34
N$17
  Top 0.61: D54.K 50.8,56.69 | 50.8,56.69 R2.2 | 50.8,56.69 50.39,56.3 D54.K | 50.8,56.69 51.21,56.3 D54.K
N$18  (via drill 0.41)
  Top 0.254: 93.59,21.27 86.68,21.27 85.41,20 U3.6 | 93.59,21.27 v94.3,21.27 | 93.59,21.27 94.19,21.02 v94.3,21.27 | 93.59,21.27 94.19,21.53 v94.3,21.27
  Top 0.406: J4.5 98.41,20.65 97.86,21.2 | 97.86,21.2 97.79,21.27 v97.16,21.27 | 97.86,21.2 97.23,21.46 v97.16,21.27 | 97.86,21.2 97.19,21.07 v97.16,21.27
  Bottom 0.254: v94.3,21.27 95.01,21.27 | 95.01,21.27 96.44,21.27 | 96.44,21.27 v97.16,21.27 | 96.44,21.27 97.05,21.02 v97.16,21.27 | 96.44,21.27 97.05,21.53 v97.16,21.27 | 95.01,21.27 94.41,21.53 v94.3,21.27 | 95.01,21.27 94.41,21.02 v94.3,21.27
  Bottom 0.813: v97.16,21.27 L50.2
N$19
  Top 0.254: J3.6 97.41,40.3 97.04,40.3 96.38,39.63 J3.1
  Top 0.508: 96.38,39.63 95.56,39.49 J3.1 96.23,38.81 96.38,39.63 | 97.41,40.3 98.09,39.82 J3.6 98.09,40.77 97.41,40.3
N$20
  pour Top (isolate 0.406, no thermals): 30.48,71.75 30.48,67.31 31.75,67.31 32.07,66.99 32.07,64.45 36.83,64.45 36.83,71.75
N$21  (via drill 0.61)
  Top 1.27: D1.A v19.68,61.59
  Bottom 0.813: v19.68,61.59 24.13,61.59 25.4,60.33 v30.48,60.33
  pour Top (isolate 0.406, no thermals): 29.59,61.28 36.83,61.28 36.83,57.78 29.59,57.78
N$22
  Top 0.254: J3.2 94.64,41.68 92.3,41.68 91.12,42.86 91.12,47.62 90.81,47.94 87.31,47.94 85.72,49.53 RN1.6
  Top 0.508: 94.64,41.68 95.32,41.2 J3.2 95.32,42.16 94.64,41.68
N$23
  pour Top (no thermals): 38.73,71.44 38.73,68.26 47.31,68.26 47.31,71.44
N$24
  pour Top (no thermals): 56.04,65.72 56.04,63.82 56.36,63.5 60.17,63.5 61.12,64.45 65.09,64.45 65.09,61.91 53.98,61.91 53.98,65.72
N$25
  Top 0.406: Q4.1 R9.1
N$30
  Top 0.254: C12.2 Y1.1 68.9,36.51 69.22,36.2 71.75,36.2 72.4,35.55 U3.24
N$31
  Top 0.254: J3.7 97.41,43.07 92.51,43.07 91.76,43.81 91.76,47.94 91.12,48.58 87.95,48.58 87,49.53 RN1.7
  Top 0.508: 97.41,43.07 98.09,42.59 J3.7 98.09,43.54 97.41,43.07
N$34
  Top 0.254: U2.6 73.03,58.74 72.71,59.05 72.07,59.05 71.75,59.37 C3.2
N$36
  Top 0.254: U2.2 78.11,59.05 78.42,59.37 79.06,59.37 79.38,59.69 C6.2 R1.1
N$38
  Top 0.254: C13.2 Y1.2 78.42,36.51 78.11,36.2 73.66,36.2 73.2,35.73 U3.23
N$39
  Top 0.254: U2.4 75.56,62.23 75.25,62.55 C4.1
N$44  (via drill 0.41)
  Top 0.254: U2.1 79.38,57.71 | 79.38,57.71 v79.38,58.42 | v76.83,64.14 76.83,63.42 | 76.83,63.42 C5.1 | 79.38,57.71 79.63,58.31 v79.38,58.42 | 79.38,57.71 79.12,58.31 v79.38,58.42 | 76.83,63.42 77.09,64.03 v76.83,64.14 | 76.83,63.42 76.58,64.03 v76.83,64.14
  Bottom 0.254: v79.38,58.42 79.38,59.13 | 79.38,59.13 79.38,60.01 C5.1 76.83,63.42 | 76.83,63.42 v76.83,64.14 | 79.38,59.13 79.12,58.53 v79.38,58.42 | 79.38,59.13 79.63,58.53 v79.38,58.42 | 76.83,63.42 77.09,64.03 v76.83,64.14 | 76.83,63.42 76.58,64.03 v76.83,64.14
N$45
  Top 0.254: U2.5 C4.2
N$46
  Top 0.254: U2.3 C5.2
N$51  (via drill 0.41)
  Top 0.254: J3.8 97.41,45.83 93.55,45.83 93.03,46.35 93.03,48.58 91.44,50.16 90.56,50.16 | RN1.5 84.45,49.61 | 84.45,49.61 v84.45,48.9 | v89.85,50.16 90.56,50.16 | 84.45,49.61 84.2,49.01 v84.45,48.9 | 84.45,49.61 84.71,49.01 v84.45,48.9 | 90.56,50.16 89.96,50.42 v89.85,50.16 | 90.56,50.16 89.96,49.91 v89.85,50.16
  Top 0.508: 97.41,45.83 98.09,45.36 J3.8 98.09,46.31 97.41,45.83
  Bottom 0.254: v84.45,48.9 85.17,48.9 | 85.17,48.9 86.04,48.9 87.31,50.16 89.14,50.16 | 89.14,50.16 v89.85,50.16 | 85.17,48.9 84.56,49.15 v84.45,48.9 | 85.17,48.9 84.56,48.64 v84.45,48.9 | 89.14,50.16 89.74,49.91 v89.85,50.16 | 89.14,50.16 89.74,50.42 v89.85,50.16
N$71
  Top 0.254: J3.3 94.64,44.45 93.03,44.45 92.39,45.09 92.39,48.26 91.44,49.21 88.58,49.21 88.27,49.53 RN1.8
  Top 0.508: 94.64,44.45 95.32,43.97 J3.3 95.32,44.93 94.64,44.45
N$74
  Top 0.254: U2.13 75.56,49.85 77.15,51.44 81.92,51.44 82.87,52.39 85.41,52.39 85.72,52.7 RN1.3
N$75
  Top 0.254: U2.14 76.83,50.16 77.47,50.8 82.23,50.8 83.19,51.75 87.95,51.75 88.27,52.07 RN1.1
N$101
  Top 0.254: U2.8 70.48,54.61 71.12,53.98 84.45,53.98 RN1.4
N$103
  Top 0.254: R1.2 90.49,62.55 91.12,61.91 91.12,51.44 93.98,48.58 93.98,47.62 94.39,47.22 94.64,47.22 J3.4
  Top 0.508: 94.64,47.22 95.32,46.74 J3.4 95.32,47.7 94.64,47.22
N$104
  Top 0.254: U2.7 71.75,55.24 72.07,54.93 86.68,54.93 87,54.61 RN1.2
N$105
  Top 0.254: J2.1 89.85,46.04 90.17,45.72 90.17,39.37 89.85,39.05 RN2.1
N$107
  Top 0.254: J2.3 86.44,45.32 87,44.77 RN2.2
  Top 0.508: 86.44,45.32 86.22,46.17 J2.3 85.59,45.55 86.44,45.32
N$108
  Top 0.254: RN2.3 85.72,42.48 J2.4
  Top 0.508: 85.72,42.48 86.17,43.24 J2.4 85.28,43.24 85.72,42.48
PBSW  (via drill 0.41)
  Top 0.254: S50.2 65.72,57.86 65.72,56.85 R4.1 C9.1 65.72,52.37 65.72,51.36 S50.1 65.76,50.34 65.76,48.93 62.23,45.4 62.23,29.84 62.87,29.21 64.77,29.21 66.36,27.62 71.36,27.62 | 71.36,27.62 v72.07,27.62 | U3.18 77.2,27.35 75.56,25.72 72.78,25.72 | v72.07,25.72 72.78,25.72 | 72.78,25.72 72.18,25.97 v72.07,25.72 | 72.78,25.72 72.18,25.46 v72.07,25.72 | 71.36,27.62 71.96,27.37 v72.07,27.62 | 71.36,27.62 71.96,27.88 v72.07,27.62
  Top 0.508: S50.1 65.23,51.84 65.72,52.37 66.25,51.88 S50.1 | S50.1 66.27,50.86 65.76,50.34 65.25,50.86 S50.1 | 65.72,56.85 66.25,57.34 S50.2 65.23,57.38 65.72,56.85
  Bottom 0.254: v72.07,27.62 72.07,26.91 | 72.07,26.91 72.07,26.43 | 72.07,26.43 v72.07,25.72 | 72.07,26.43 71.82,25.83 v72.07,25.72 | 72.07,26.43 72.33,25.83 v72.07,25.72 | 72.07,26.91 72.33,27.51 v72.07,27.62 | 72.07,26.91 71.82,27.51 v72.07,27.62
PU2
  Top 0.61: X50.16 21.13,44.45 | 21.13,44.45 22.05,44.45 | 22.05,44.45 X50.17 | X50.16 20.32,45.26 | 20.32,45.26 R7.1 | 21.13,44.45 20.62,44.84 X50.16 | 21.13,44.45 20.62,44.06 X50.16 | 20.32,45.26 19.93,44.75 X50.16 | 20.32,45.26 20.71,44.75 X50.16 | 22.05,44.45 22.56,44.06 X50.17 | 22.05,44.45 22.56,44.84 X50.17
RECALL#  (via drill 0.41)
  Top 0.254: U3.40 60.47,22.4 56.2,26.67 56.2,31.11 52.39,34.92 31.19,34.92 | v30.48,34.92 31.19,34.92 | 31.19,34.92 30.59,35.18 v30.48,34.92 | 31.19,34.92 30.59,34.67 v30.48,34.92
  Bottom 0.254: v30.48,34.92 30.48,35.64 | 30.48,35.64 30.48,43.64 X50.20 | 30.48,35.64 30.22,35.03 v30.48,34.92 | 30.48,35.64 30.74,35.03 v30.48,34.92
  Bottom 0.508: 30.48,43.64 30.88,44.08 X50.20 30.08,44.08 30.48,43.64
RESET#  (via drill 0.41)
  Top 0.254: RN2.5 84.45,34.29 83.82,33.66 76.68,33.66 75.6,32.58 U3.20 75.6,28.54 75.88,28.26 75.88,27.3 75.25,26.67 67.31,26.67 66.67,26.04 66.67,18.17 | v66.67,17.46 66.67,18.17 | 51.99,17.46 51.12,17.46 50.8,17.78 44.45,17.78 | 51.99,17.46 v52.7,17.46 | 44.45,17.78 44.45,16.15 J5.6 | 44.45,17.78 33.34,17.78 32.38,16.83 32.38,10.48 31.75,9.84 26.04,9.84 25.72,10.16 R13.1 | 51.99,17.46 52.59,17.21 v52.7,17.46 | 51.99,17.46 52.59,17.72 v52.7,17.46 | 66.67,18.17 66.42,17.57 v66.67,17.46 | 66.67,18.17 66.93,17.57 v66.67,17.46
  Top 0.406: R13.1 C15.1
  Top 0.508: 44.45,16.15 44,15.61 J5.6 44.9,15.61 44.45,16.15
  Top 0.813: S2.2 R13.1
  Bottom 0.254: v52.7,17.46 53.42,17.46 | 53.42,17.46 53.66,17.46 53.98,17.78 64.77,17.78 65.09,17.46 65.96,17.46 | 65.96,17.46 v66.67,17.46 | 53.42,17.46 52.81,17.72 v52.7,17.46 | 53.42,17.46 52.81,17.21 v52.7,17.46 | 65.96,17.46 66.56,17.21 v66.67,17.46 | 65.96,17.46 66.56,17.72 v66.67,17.46
RTS
  Top 0.254: U3.25 71.6,31.59 69.53,33.66 65.41,33.66 64.77,34.29 64.77,44.13 65.72,45.09 71.44,45.09 71.75,45.4 U2.10
RXD
  Top 0.254: U3.27 70,31.28 68.9,32.38 64.77,32.38 63.5,33.66 63.5,44.77 69.22,50.48 73.98,50.48 74.3,50.16 U2.12
SCLK  (via drill 0.41)
  Top 0.254: RN2.7 87,34.29 87.63,33.66 89.53,33.66 90.17,33.02 90.17,25.72 88.45,24 U3.11 77.66,24 76.2,22.54 70.56,22.54 | v69.85,22.54 70.56,22.54 | X50.12 22.86,28.4 22.86,26.99 23.5,26.35 35.56,26.35 37.15,24.77 37.15,23.25 | 37.15,23.25 v37.15,22.54 | 70.56,22.54 69.96,22.8 v69.85,22.54 | 70.56,22.54 69.96,22.29 v69.85,22.54 | 37.15,23.25 36.89,22.65 v37.15,22.54 | 37.15,23.25 37.4,22.65 v37.15,22.54
  Top 0.508: 22.86,28.4 23.26,28.84 X50.12 22.46,28.84 22.86,28.4
  Bottom 0.254: 69.14,22.54 67.63,22.54 66.99,23.18 40.01,23.18 39.37,22.54 37.86,22.54 | 69.14,22.54 v69.85,22.54 | v37.15,22.54 37.86,22.54 | 69.14,22.54 69.74,22.29 v69.85,22.54 | 69.14,22.54 69.74,22.8 v69.85,22.54 | 37.86,22.54 37.26,22.8 v37.15,22.54 | 37.86,22.54 37.26,22.29 v37.15,22.54
SS  (via drill 0.41)
  Top 0.254: U3.10 78.13,23.2 76.52,21.59 69.61,21.59 | v68.9,21.59 69.61,21.59 | X50.11 25.4,28.4 25.4,27.62 25.72,27.3 35.88,27.3 38.42,24.77 38.42,22.3 | 38.42,22.3 v38.42,21.59 | 69.61,21.59 69.01,21.85 v68.9,21.59 | 69.61,21.59 69.01,21.33 v68.9,21.59 | 38.42,22.3 38.16,21.7 v38.42,21.59 | 38.42,22.3 38.67,21.7 v38.42,21.59
  Top 0.508: 25.4,28.4 25.8,28.84 X50.11 25,28.84 25.4,28.4
  Bottom 0.254: 68.19,21.59 67.63,21.59 66.67,22.54 40.32,22.54 39.37,21.59 39.13,21.59 | 68.19,21.59 v68.9,21.59 | v38.42,21.59 39.13,21.59 | v38.42,21.59 37.71,21.59 | 37.71,21.59 R51.2 | 68.19,21.59 68.79,21.33 v68.9,21.59 | 68.19,21.59 68.79,21.85 v68.9,21.59 | 39.13,21.59 38.53,21.85 v38.42,21.59 | 39.13,21.59 38.53,21.33 v38.42,21.59 | 37.71,21.59 38.31,21.33 v38.42,21.59 | 37.71,21.59 38.31,21.85 v38.42,21.59
STORE#  (via drill 0.41)
  Top 0.254: U3.39 60.62,23.2 56.83,26.99 56.83,31.43 52.7,35.56 32.38,35.56 31.11,36.83 29.29,36.83 | v28.57,36.83 29.29,36.83 | 29.29,36.83 28.68,37.09 v28.57,36.83 | 29.29,36.83 28.68,36.57 v28.57,36.83
  Bottom 0.254: X50.9 30.48,30.02 30.48,31.75 28.57,33.66 28.57,36.12 | 28.57,36.12 v28.57,36.83 | 28.57,36.12 28.83,36.72 v28.57,36.83 | 28.57,36.12 28.32,36.72 v28.57,36.83
  Bottom 0.508: 30.48,30.02 30.08,29.58 X50.9 30.88,29.58 30.48,30.02
TCK
  Top 0.254: U3.57 72.4,12.39 69.53,9.53 40.64,9.53 39.69,9.53 39.37,9.84 39.37,10.79 J5.1
  Bottom 0.406: RN50.5 41.91,9.84 41.27,10.48 40.01,10.48 39.37,11.11 J5.1
TDI
  Top 0.254: U3.54 70,12.85 68.58,11.43 52.7,11.43 51.44,12.7 50.44,12.7 J5.9
  Top 0.508: 50.44,12.7 49.9,13.15 J5.9 49.9,12.25 50.44,12.7
  Bottom 0.406: RN50.8 45.72,9.84 46.35,10.48 48.9,10.48 49.53,11.11 49.53,11.79 | 49.53,11.79 J5.9 | 49.53,11.79 49.99,12.26 J5.9 | 49.53,11.79 49.07,12.26 J5.9
TDO
  Top 0.254: U3.55 70.8,12.7 68.9,10.79 48.58,10.79 48.26,11.11 48.26,13.34 47.62,13.97 43.18,13.97 42.56,13.35 J5.3
  Top 0.508: 42.56,13.35 41.86,13.28 J5.3 42.49,12.65 42.56,13.35
  Bottom 0.406: 41.91,11.79 41.91,11.43 43.18,10.16 RN50.6 | 41.91,11.79 J5.3 | 41.91,11.79 42.37,12.26 J5.3 | 41.91,11.79 41.45,12.26 J5.3
TMS
  Top 0.254: U3.56 71.6,12.54 69.22,10.16 44.77,10.16 44.45,10.48 44.45,11.79 J5.5
  Top 0.508: 44.45,11.79 44.9,12.33 J5.5 44,12.33 44.45,11.79
  Bottom 0.406: RN50.7 44.45,11.79 | 44.45,11.79 J5.5 | 44.45,11.79 44.91,12.26 J5.5 | 44.45,11.79 43.99,12.26 J5.5
TXD  (via drill 0.41)
  Top 0.254: U3.28 69.2,31.13 68.58,31.75 64.45,31.75 62.87,33.34 62.87,45.09 69.22,51.44 72.31,51.44 | v73.03,49.53 73.03,48.82 | 73.03,48.82 U2.11 | 72.31,51.44 v73.03,51.44 | 73.03,48.82 73.28,49.42 v73.03,49.53 | 73.03,48.82 72.77,49.42 v73.03,49.53 | 72.31,51.44 72.92,51.18 v73.03,51.44 | 72.31,51.44 72.92,51.69 v73.03,51.44
  Bottom 0.254: v73.03,51.44 73.03,50.72 | 73.03,50.72 73.03,50.24 | 73.03,50.24 v73.03,49.53 | 73.03,50.24 72.77,49.64 v73.03,49.53 | 73.03,50.24 73.28,49.64 v73.03,49.53 | 73.03,50.72 73.28,51.33 v73.03,51.44 | 73.03,50.72 72.77,51.33 v73.03,51.44
UID
  Top 0.254: J4.4 98.26,19.85 97.79,20.32 96.84,20.32 94.76,22.4 U3.9
UVCON  (via drill 0.41)
  Top 0.254: U3.2 76.23,16.8 72.39,20.64 70.56,20.64 | v69.85,20.64 70.56,20.64 | 45.33,20.64 33.66,20.64 30.8,23.5 16.83,23.5 15.88,24.45 15.88,47.87 | 45.33,20.64 v46.04,20.64 | 15.88,47.87 v15.88,48.58 | 70.56,20.64 69.96,20.89 v69.85,20.64 | 70.56,20.64 69.96,20.38 v69.85,20.64 | 45.33,20.64 45.93,20.38 v46.04,20.64 | 45.33,20.64 45.93,20.89 v46.04,20.64 | 15.88,47.87 16.13,48.47 v15.88,48.58 | 15.88,47.87 15.62,48.47 v15.88,48.58
  Top 0.406: R5.1 29.21,54.36 23.88,54.36 23.5,53.98 23.5,49.29 | v23.5,48.58 23.5,49.29 | 23.5,49.29 23.3,48.64 v23.5,48.58 | 23.5,49.29 23.69,48.64 v23.5,48.58
  Bottom 0.254: 69.14,20.64 67.63,20.64 66.36,21.91 49.53,21.91 48.26,20.64 46.75,20.64 | 69.14,20.64 v69.85,20.64 | v46.04,20.64 46.75,20.64 | v15.88,48.58 16.59,48.58 | 16.59,48.58 22.78,48.58 | 22.78,48.58 v23.5,48.58 | 69.14,20.64 69.74,20.38 v69.85,20.64 | 69.14,20.64 69.74,20.89 v69.85,20.64 | 46.75,20.64 46.15,20.89 v46.04,20.64 | 46.75,20.64 46.15,20.38 v46.04,20.64 | 16.59,48.58 15.98,48.83 v15.88,48.58 | 16.59,48.58 15.98,48.32 v15.88,48.58 | 22.78,48.58 23.39,48.32 v23.5,48.58 | 22.78,48.58 23.39,48.83 v23.5,48.58
VBUS  (via drill 0.41)
  Top 0.254: U3.8 81.59,21.6 81.92,21.27 83.43,21.27 | v84.14,21.27 83.43,21.27 | 83.43,21.27 84.03,21.02 v84.14,21.27 | 83.43,21.27 84.03,21.53 v84.14,21.27
  Top 0.813: 99.38,16.19 v84.14,16.19 84.14,10.79 83.19,9.84 72.87,9.84 70.33,7.3 14.45,7.3 12.86,8.89 12.86,39.69 11.91,40.64 7.62,40.64 5.71,42.55 5.71,63.82 6.67,64.77 20.95,64.77 21.59,64.14 21.59,57.47 | C7.+ Q1.3
  Top 1.676: D2.A 21.59,57.47 C7.+
  Bottom 0.254: v84.14,16.19 84.14,16.9 | 84.14,16.9 84.14,20.56 | 84.14,20.56 v84.14,21.27 | 84.14,20.56 84.39,21.16 v84.14,21.27 | 84.14,20.56 83.88,21.16 v84.14,21.27 | 84.14,16.9 83.88,16.3 v84.14,16.19 | 84.14,16.9 84.39,16.3 v84.14,16.19
  pour Top (isolate 0.406, no thermals): 98.74,17.46 100.65,17.46 100.65,16.99 99.66,16 98.74,16
WE#  (via drill 0.41)
  Top 0.254: U3.41 60.31,21.6 55.56,26.35 55.56,30.8 52.07,34.29 34.92,34.29 34.29,33.66 33.73,33.66 | v33.02,33.66 33.73,33.66 | 33.73,33.66 33.13,33.91 v33.02,33.66 | 33.73,33.66 33.13,33.4 v33.02,33.66
  Bottom 0.254: v33.02,33.66 33.02,34.37 | 33.02,34.37 33.02,43.64 X50.21 | 33.02,34.37 32.76,33.77 v33.02,33.66 | 33.02,34.37 33.28,33.77 v33.02,33.66
  Bottom 0.508: 33.02,43.64 33.42,44.08 X50.21 32.62,44.08 33.02,43.64

## Text on the board
Top: TOP SIDE
Bottom: BOTTOM SIDE | KG4LNE
tPlace: RS-232 | 15 | 28 | ISP | LEVER | ZIF | X2444 | X2212 | 8.0 MHZ | MOUNT ZIF OTHER SIDE | 14 | 1 | 1 | 2 | GE-FLASH-USB | X2212/X2444 | PROGRAMMER | JTAG | USB OTG | MADE IN USA